# Altium PCB followEm.PcbDoc
Units mil, origin at the board's own origin, x right, y up, seen from the top; angles counter-clockwise.
Board outline 885 x 325 mil, 2 copper layers (Top Layer, Bottom Layer); 7 components, 5 nets, 21 pads, 2 vias.
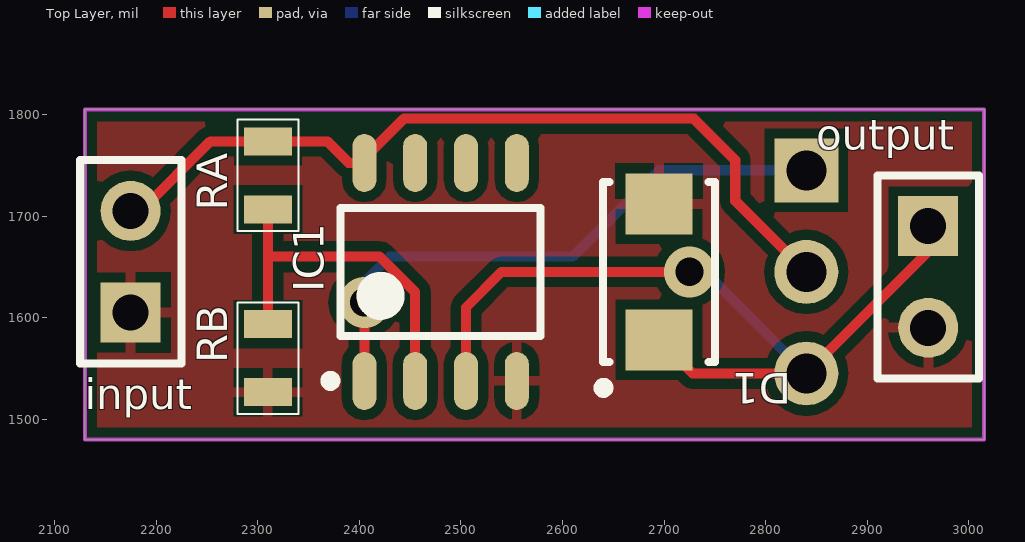
[diagram p0: Top Layer view]
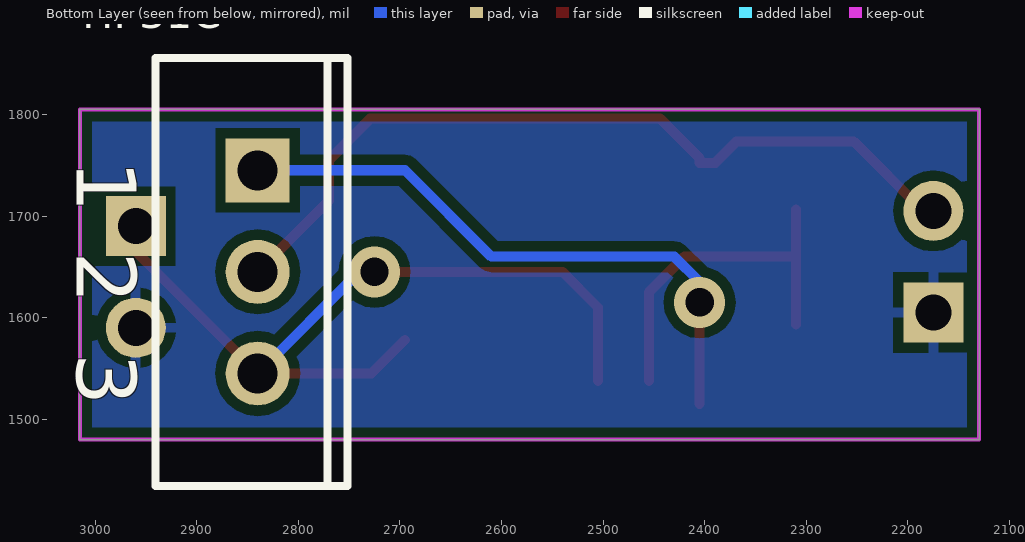
[diagram p1: Bottom Layer view, seen from below]
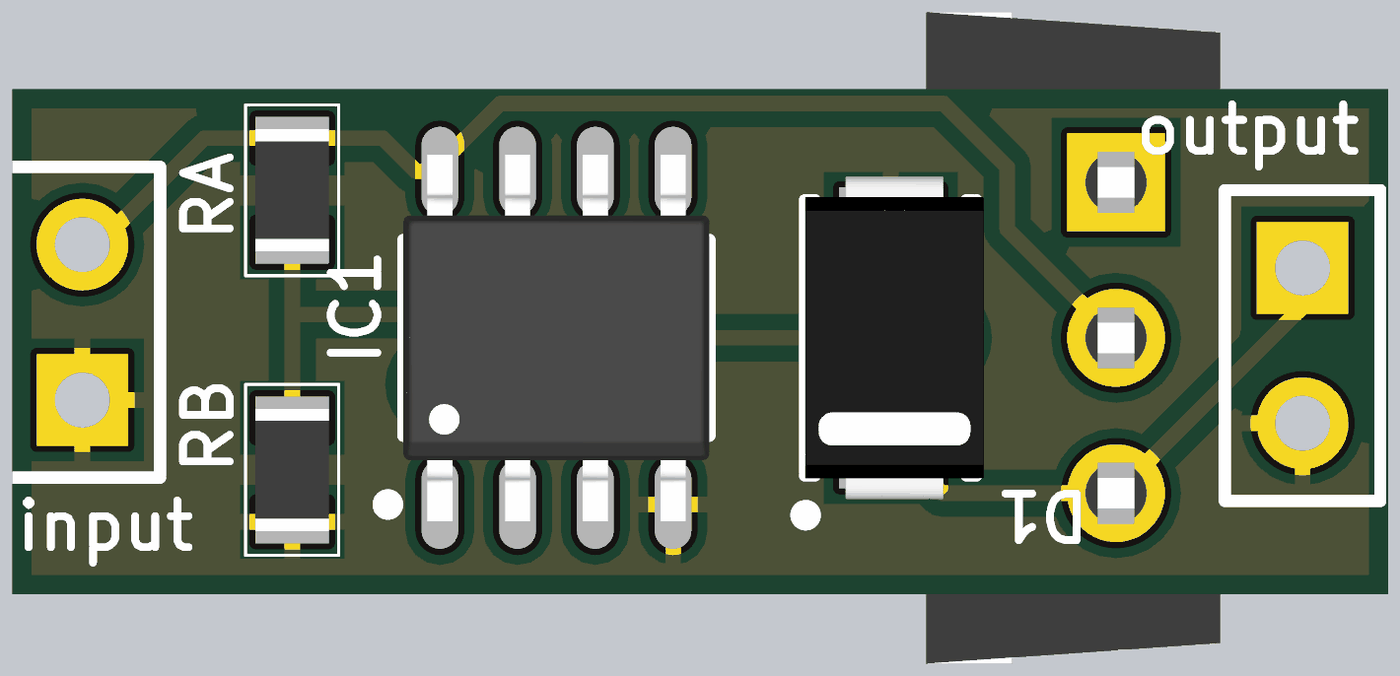
[diagram p2: 3D render of the assembled board from above, using the file's embedded part models]

## Layer stack, top to bottom
Top Solder: solder mask 0.4, Solder Resist, Dk 3.5
Top Layer: signal copper 1.4
Dielectric 1: dielectric 12.6, FR-4, Dk 4.8
Bottom Layer: signal copper 1.4
Bottom Solder: solder mask 0.4, Solder Resist, Dk 3.5

## Board outline
2130,1480 3015,1480 3015,1805 2130,1805

## Design rules (kind name [scope] priority, off if disabled: settings)
Clearance [All] p1: gap=10 ignorepadtopadclearanceinfootprint=FALSE except(0: Arc-Hole Track-Hole SMDPad-Hole THPad-Hole Via-Hole Fill-Hole Poly-Hole Region-Hole Text-Hole)
PolygonConnect [All] p1: connectstyle=Relief reliefconductorwidth=10 reliefentries=4 polygonreliefangle="90 Angle" airgapwidth=10
RoutingVias [All] p1: holewidth=28 width=50 viastyle="Through Hole" minholewidth=28 minwidth=50 maxholewidth=28 maxwidth=50
SolderMaskExpansion [All] p1: expansion=4
Width [All] p1: maxlimit=10 minlimit=10 preferedwidth=10
30 further rules are at their usual default settings.

## Components (designator, comment, footprint, x,y, rotation, side; value= is the part's Value field where it differs from the comment)
D1 "D Zener" DO-214AC 2695,1645 r90 top value=8V
IC1 "LM358" SOIC-8 2480,1645 r90 top
input "Header 2" HDR1X2 2175,1605 r90 top
output "Header 2" HDR1X2 2960,1690 r270 top
RA "res_SMD" "RES 0805 2012" 2310,1740 r90 top value=3K
RB "res_SMD" "RES 0805 2012" 2310,1560 r90 top value=1K
TIP31C "BJT NPN transistor" TO-220-AB 2840,1645 r270 bottom

## Footprints (in the part's own frame and the unit in brackets; to place one, negate y for a bottom-side part, rotate by r counter-clockwise, add the part's x,y. Pads: shape width x height; smd on the part's side, far side on the other; paste and mask are expansions set on the pad)
DO-214AC [mm] "SMA PACKAGE"
  rect 1.52x1.68 smd: 1(1.7,0) 2(-1.7,0)
  silkscreen extent -3.02,-1.4 2.25,1.51, body extent -2.64,-1.52 2.64,1.4, height 2.41
HDR1X2 [mm] "Connector; Header; 2 Position"
  rect 1.5x1.5 hole 0.9: 1(0,0)
  round 1.5 hole 0.9: 2(2.54,0)
  silkscreen extent -1.27,-1.27 3.81,1.27
"RES 0805 2012" [mm] "Chip Resistor, 2-Leads, Body 2,00x1,20mm, IPC Medium Density"
  rect 0.7x1.2 smd: 1(-0.85,0) 2(0.85,0)
  silkscreen extent -1.4,-0.76 1.4,0.76, body extent -1,-0.6 1,0.6, height 0.6
SOIC-8 [mm]
  oval 1.45x0.6 smd: 1(-2.725,1.905) 2(-2.725,0.635) 3(-2.725,-0.635) 4(-2.725,-1.905) 5(2.725,-1.905) 6(2.725,-0.635) 7(2.725,0.635) 8(2.725,1.905)
  silkscreen extent -2.85,-2.5 1.6,2.88, body extent -3,-2.5 3,2.5, height 1.75
TO-220-AB [mm] "TO, Thru-Hole, Vertical, Heatsink Mounted; 3 In-Line Leads; Pitch 2.54 mm"
  rect 1.6x1.6 hole 1: 1(-2.54,0)
  round 1.6 hole 1: 2(0,0) 3(2.54,0)
  silkscreen extent -5.35,-2.55 5.35,2.25, body extent -5.32,-1.7 5.33,3.1, height 19.5

## Part data
D1: "Zener Diode"
input output: "Header, 2-Pin", LatestRevisionDate=17-Jul-2002, LatestRevisionNote="Re-released for DXP Platform.", Publisher="Altium Limited"
RA RB: "Resistor", LatestRevisionDate=29-May-2009, LatestRevisionNote="IPC-7351 Footprint Added.", PackageDescription="Chip Resistor", PackageReference=J1-0603, Published=8-Jun-2000, Publisher="Altium Limited"
TIP31C: "NPN General Purpose Amplifier", ComponentLink1Description="Manufacturer Link", ComponentLink1URL=http://www.fairchildsemi.com/, ComponentLink2Description=Datasheet, ComponentLink2URL=http://www.fairchildsemi.com/ds/2N%2F2N3904.pdf, DatasheetVersion=1997, LatestRevisionDate=15-Jan-2003, LatestRevisionNote="PCB Footprint 'BCY-W3/D4.7' replaced", PackageDescription="TO, Flat Index; 3 In-Line, Axial Leads; Body Dia. 4.5mm; Leads 0.51 x 0.48 mm (max)", PackageReference=TO-92A, PackageVersion=Sep-1998, Published=8-Jun-2000, Publisher="Altium Limited"

## Via types
v1: diameter 50, hole 28, Top Layer to Bottom Layer, tented both sides, 2 vias

## Nets (pads, with @x,y where several pads share a name; then routed paths per layer and width w, separated by ;. In a path a pad name is that pad's centre, name@x,y a point inside that pad or via, vN(x,y) a via of type N, cw(c..) or ccw(c..) an arc to the next point about the centre after c; other vN are vias at no path point)
GND: D1.1 IC1.4 input.1 output.2 RB.1
NetD1_2: D1.2 IC1.3 output.1 TIP31C.3 | length 816.6
  Top Layer w10: IC1.3 2505,1610 2540,1645 v1(2725,1645) ; D1.2 2728.07,1545 TIP31C.3 2960,1665 output.1
  Bottom Layer w10: v1(2725,1645) 2740,1645 TIP31C.3
NetIC1_1: IC1.1 TIP31C.1 | length 600.6
  Top Layer w10: IC1.1@2405,1515 IC1.1 v1(2405,1615)
  Bottom Layer w10: v1(2405,1615) 2405,1635 2430,1660 2610,1660 2695,1745 TIP31C.1
NetIC1_2: IC1.2 RA.1 RB.2 | length 359.9
  Top Layer w10: RB.2 2310,1660 ; RA.1 2310,1660 ; IC1.2 2455,1625 2420,1660 2310,1660
VCC: IC1.8 input.2 RA.2 TIP31C.2 | length 808.8
  Top Layer w10: input.2 2185,1705 2253.46,1773.46 RA.2 2368.46,1773.46 2389.65,1752.28 IC1.8 2405,1756.93 2443.89,1795.83 2729.17,1795.83 2770,1755 2770,1715 TIP31C.2
pads on no net: IC1.5 IC1.6 IC1.7

## Polygon pours and split planes (outlines as drawn)
GND on Bottom Layer "Top Layer-No Net" (solid, pour order 0): 2130,1805 2130,1480 3015,1480 3015,1805
GND on Top Layer "Top Layer-No Net" (solid, pour order 2): 2130,1805 2130,1480 3015,1480 3015,1805

## Keep-outs
Keep-Out Layer:
  the board outline again, w3.94

## Text inside footprints (layer, text, board x,y; h text height)
TIP31C: Bottom Overlay "3" at 3018.15,1564.68 h59.06 r90; Bottom Overlay "2" at 3018.15,1664.68 h59.06 r90; Bottom Overlay "1" at 3018.15,1754.84 h59.06 r90